# Altium PCB ElectrodeBreakout.PcbDoc
Units mil, origin at the board's own origin, x right, y up, seen from the top; angles counter-clockwise.
Board outline 3000 x 1500 mil, 2 copper layers (Top Layer, Bottom Layer); 23 components, 17 nets, 93 pads, 18 vias.
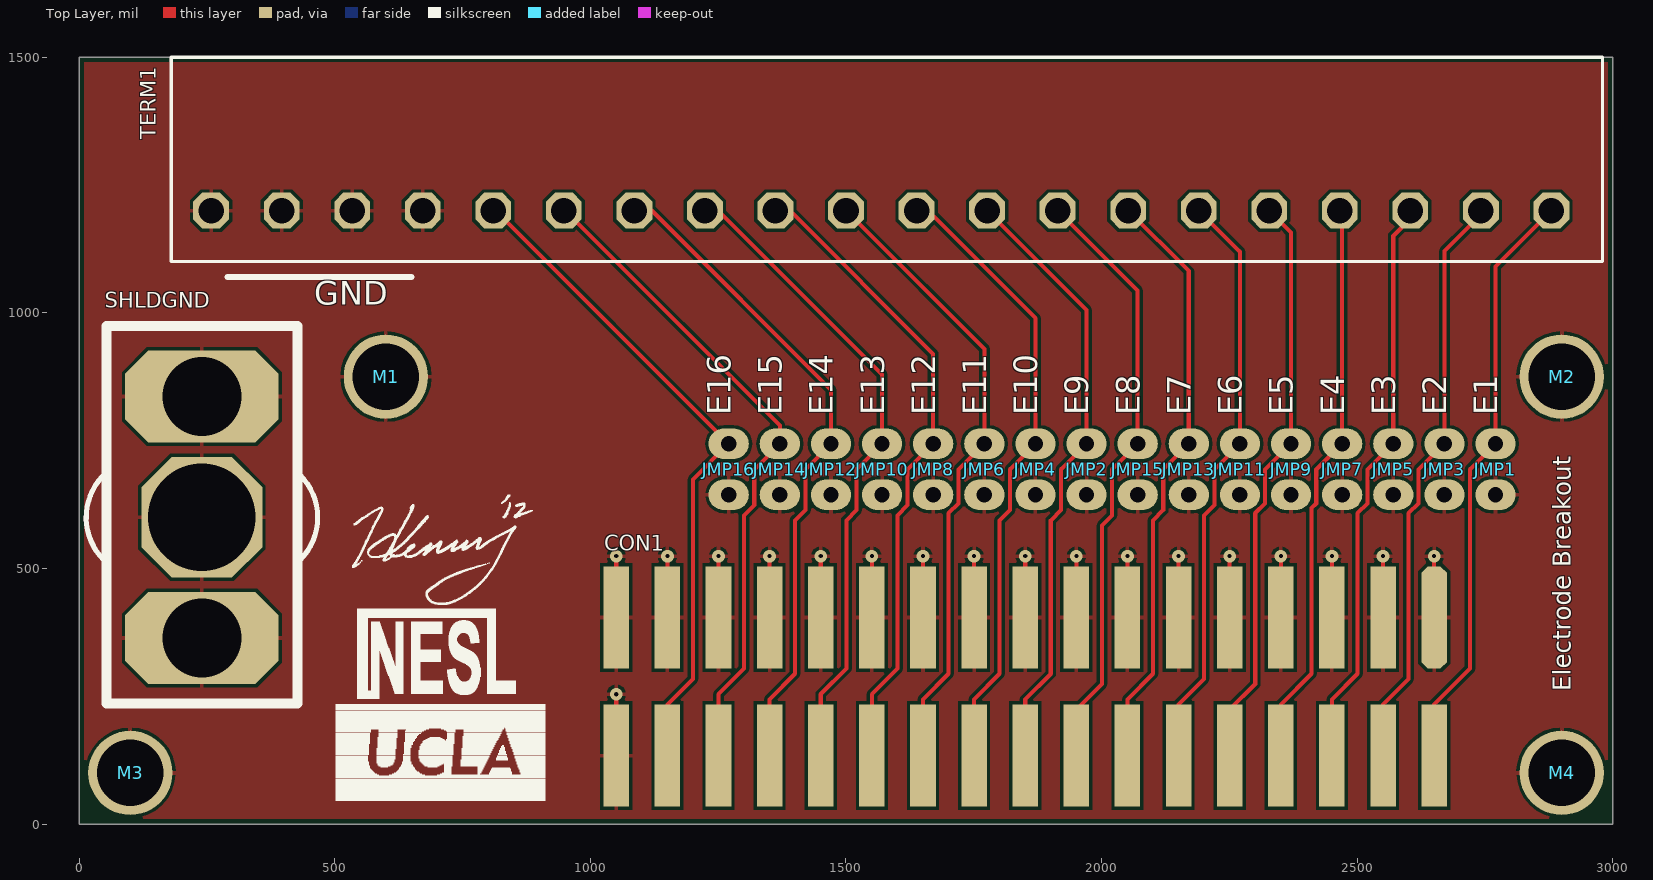
[diagram p0: Top Layer view]
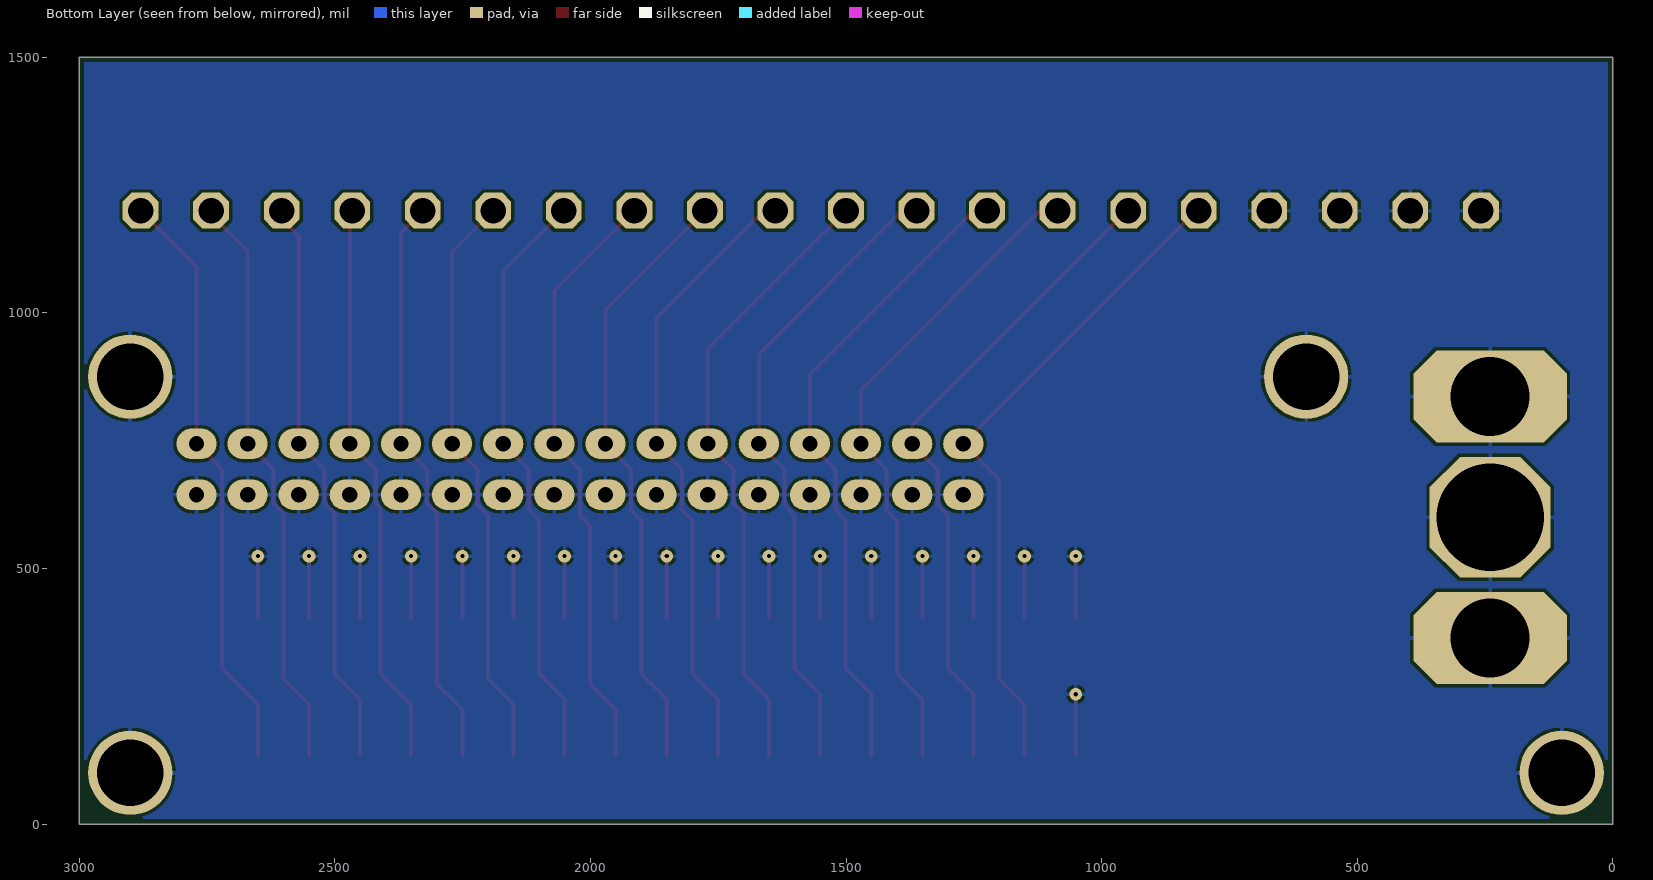
[diagram p1: Bottom Layer view, seen from below]

## Layer stack, top to bottom
Top Layer: signal copper 1.4
Dielectric: dielectric 12.6, FR-4, Dk 4.8
Bottom Layer: signal copper 1.4

## Board outline
0,0 3000,0 3000,1500 0,1500

## Design rules (kind name [scope] priority, off if disabled: settings)
Clearance "Clearance~Sunstone Circuits" [All] p1: gap=6 // Sunstone Circuits Minimum Clearance Rule (MLB~4&6 Layer Designs)
HoleSize "HoleSize~Sunstone Circuits" [All] p1: absolutevalues=TRUE maxlimit=251 minlimit=8 maxpercent=80.000 minpercent=20.000 // Sunstone Circuits Hole Size Rule (MLB~4&6 Layer Designs)
HoleSize Testpoint [All] p2: absolutevalues=TRUE maxlimit=100 minlimit=1 maxpercent=80.000 minpercent=20.000
HoleSize TestPointUsage [All] p3: absolutevalues=TRUE maxlimit=100 minlimit=1 maxpercent=80.000 minpercent=20.000
MinimumAnnularRing "MinimumAnnularRing~Sunstone Circuits" [All] p1: minimumring=7 // Sunstone Circuits Minimum Annular Ring (MLB~4&6 Layer Designs)
PlaneClearance "PlaneClearance~Sunstone Circuits" [All] p1: clearance=12 // Sunstone Circuits Power Plane Clearance Rule (MLB~4&6 Layer Designs)
PlaneConnect "PlaneConnect~Sunstone Circuits" [All] p1: planeconnectstyle=Relief reliefexpansion=10 reliefentries=4 reliefconductorwidth=8 reliefairgap=10 // Sunstone Circuits Power Plane Connect Rule (MLB~4&6 Layer Designs)
PolygonConnect "PolygonConnect~Sunstone Circuits" [All] p1: connectstyle=Relief reliefconductorwidth=8 reliefentries=4 polygonreliefangle="90 Angle" // Sunstone Circuits Polygon Connect Style (MLB~4&6 Layer Designs)
RoomDefinition ElectrodeBreakout [InComponentClass('ElectrodeBreakout')] p1: confinementstyle=ConfineIn formatcopy=TRUE lockcomponents=FALSE outline -2.27,-4.56 2997.73,-4.56 2997.73,1515.44 -2.27,1515.44
RoutingVias "RoutingVias~Sunstone Circuits" [All] p1: holewidth=16 width=30 viastyle="Through Hole" minholewidth=8 minwidth=24 maxholewidth=20 maxwidth=40 // Sunstone Circuits Routing Vias Rule (MLB~4&6 Layer Designs)
ShortCircuit "ShortCircuit~Sunstone Circuits" [All] p1: allowed=FALSE // Sunstone Circuits Short Circuit Rule~Do Not Allow (MLB~4&6 Layer Designs)
SilkscreenOverComponentPads [All] p1: minsilkscreentomaskgap=10
SolderMaskExpansion "SolderMaskExpansion~Sunstone Circuits" [All] p1: expansion=3 // Sunstone Circuits Solder Mask Expansion Rule (MLB~4&6 Layer Designs)
ViasUnderSMD "ViasUnderSMD~Sunstone Circuits" [All] p1: allowed=FALSE // Sunstone Circuits Vias Under SMD~Do Not Allow (MLB~4&6 Layer Designs)
Width "Width~Sunstone Circuits" [All] p1: maxlimit=100 minlimit=6 preferedwidth=10 // Sunstone Circuits Minimum Width Rule (MLB~4&6 Layer Designs)
23 further rules are at their usual default settings.

## Components (designator, comment, footprint, x,y, rotation, side; value= is the part's Value field where it differs from the comment)
CON1 "34 Rectangular Header Pin" "34PIN-RECTANGULAR HEADER-SURFACEMOUNT-100MILSPACING" 2650.58,403.9 r180 top
JMP1 "JMPR-2PIN-THRU" M02 2770.58,643.9 r90 top
JMP2 "JMPR-2PIN-THRU" M02 1970.58,643.9 r90 top
JMP3 "JMPR-2PIN-THRU" M02 2670.58,643.9 r90 top
JMP4 "JMPR-2PIN-THRU" M02 1870.58,643.9 r90 top
JMP5 "JMPR-2PIN-THRU" M02 2570.58,643.9 r90 top
JMP6 "JMPR-2PIN-THRU" M02 1770.58,643.9 r90 top
JMP7 "JMPR-2PIN-THRU" M02 2470.58,643.9 r90 top
JMP8 "JMPR-2PIN-THRU" M02 1670.58,643.9 r90 top
JMP9 "JMPR-2PIN-THRU" M02 2370.58,643.9 r90 top
JMP10 "JMPR-2PIN-THRU" M02 1570.58,643.9 r90 top
JMP11 "JMPR-2PIN-THRU" M02 2270.58,643.9 r90 top
JMP12 "JMPR-2PIN-THRU" M02 1470.58,643.9 r90 top
JMP13 "JMPR-2PIN-THRU" M02 2170.58,643.9 r90 top
JMP14 "JMPR-2PIN-THRU" M02 1370.58,643.9 r90 top
JMP15 "JMPR-2PIN-THRU" M02 2070.58,643.9 r90 top
JMP16 "JMPR-2PIN-THRU" M02 1270.58,643.9 r90 top
M1 "HOLE" "MOUNTING_HOLE-125mil - Thin"#1 560,880 r0 top
M2 "HOLE" "MOUNTING_HOLE-125mil - Thin"#2 2900,880 r0 top
M3 "HOLE" "MOUNTING_HOLE-125mil - Thin"#3 100,100 r0 top
M4 "HOLE" "MOUNTING_HOLE-125mil - Thin"#3 2900,100 r0 top
SHLDGND "SCREW TERM (10-32)" LOW-PROFILE-SCREWTERMINAL 240,600 r90 top (schematic designator CON2)
TERM1 "TERM BLOCK 20POS" EUROSTYLECONNECTOR-20PIN-3.5MM 2880,1200 r180 top

## Footprints (in the part's own frame and the unit in brackets; to place one, negate y for a bottom-side part, rotate by r counter-clockwise, add the part's x,y. Pads: shape width x height; smd on the part's side, far side on the other; paste and mask are expansions set on the pad)
"34PIN-RECTANGULAR HEADER-SURFACEMOUNT-100MILSPACING" [mm]
  oct 1.27x5.08 smd: 1(0,0)
  rect 1.27x5.08 smd: 2(0,6.86) 3(2.54,0) 4(2.54,6.86) 5(5.08,0) 6(5.08,6.86) 7(7.62,0) 8(7.62,6.86) 9(10.16,0) 10(10.16,6.86) 11(12.7,0) 12(12.7,6.86) 13(15.24,0) 14(15.24,6.86) 15(17.78,0) 16(17.78,6.86) 17(20.32,0) 18(20.32,6.86) 19(22.86,0) 20(22.86,6.86) 21(25.4,0) 22(25.4,6.86) 23(27.94,0) 24(27.94,6.86) 25(30.48,0) 26(30.48,6.86) 27(33.02,0) 28(33.02,6.86) 29(35.56,0) 30(35.56,6.86) 31(38.1,0) 32(38.1,6.86) 33(40.64,0) 34(40.64,6.86)
EUROSTYLECONNECTOR-20PIN-3.5MM [mil]
  oct 70x70 hole 50: 1(0,0) 2(138,0) 3(276,0) 4(414,0) 5(552,0) 6(690,0) 7(828,0) 8(966,0) 9(1104,0) 10(1242,0) 11(1380,0) 12(1518,0) 13(1656,0) 14(1794,0) 15(1932,0) 16(2070,0) 17(2208,0) 18(2346,0) 19(2484,0) 20(2622,0)
  silkscreen extent -100,-300 2700,100
LOW-PROFILE-SCREWTERMINAL [mil] "TERMINAL SCREW 10/32 .062\"PC MNT"
  oct 180x300 hole 155: 1(-236.22,0) 1(236.22,0)
  oct 236.22x236.22 hole 210: 1(0,0)
  silkscreen extent -364,-226 374,226
M02 [mil]
  oval 60x78.74 hole 30: 1(0,0) 2(100,0)
"MOUNTING_HOLE-125mil - Thin"#1 [mil]
  round 165 hole 130: 0(40,-5)
"MOUNTING_HOLE-125mil - Thin"#2 [mil]
  round 165 hole 130: 0(0,-5)
"MOUNTING_HOLE-125mil - Thin"#3 [mil]
  round 165 hole 130: 0(0,0)

## Part data
CON1: library part 34pinHeader
M1 M2 M3 M4: library part MountingHole
SHLDGND: library part ScrewTerminal-PCB-ThruHole
TERM1: library part EuroStyleTerminalBlock_20Pin

## Via types
v1: diameter 25, hole 8, Top Layer to Bottom Layer, 18 vias

## Nets (pads, with @x,y where several pads share a name; then routed paths per layer and width w, separated by ;. In a path a pad name is that pad's centre, name@x,y a point inside that pad or via, vN(x,y) a via of type N, cw(c..) or ccw(c..) an arc to the next point about the centre after c; other vN are vias at no path point)
ELECTRODE1: CON1.2 JMP1.2 TERM1.1 | length 1161.2
  Top Layer w8: CON1.2 2650.58,233.9 2720.58,303.9 2720.58,693.9 JMP1.2 2770.58,1090.58 TERM1.1
ELECTRODE2: CON1.4 JMP3.2 TERM1.2 | length 1145.5
  Top Layer w8: CON1.4 2550.58,233.9 2600.58,283.9 2600.58,607.96 2619.95,627.33 2619.95,693.27 JMP3.2 2670.58,1120.58 2742,1192 TERM1.2
ELECTRODE3: CON1.6 JMP5.2 TERM1.3 | length 1129.7
  Top Layer w8: CON1.6 2450.58,243.9 2500.58,293.9 2500.58,607.96 2519.95,627.33 2519.95,693.27 JMP5.2 2570.58,1150.58 2604,1184 TERM1.3
ELECTRODE4: CON1.8 JMP7.2 TERM1.4 | length 1117.8
  Top Layer w8: CON1.8 2350.58,233.9 2410.58,293.9 2410.58,617.96 2419.95,627.33 2419.95,693.27 JMP7.2 2470.58,1195.42 TERM1.4
ELECTRODE5: CON1.10 JMP9.2 TERM1.5 | length 1133.5
  Top Layer w8: CON1.10 2250.58,223.9 2300.58,273.9 2300.58,607.96 2319.95,627.33 2319.95,693.27 JMP9.2 2370.58,1157.42 TERM1.5
ELECTRODE6: CON1.12 JMP11.2 TERM1.6 | length 1149.3
  Top Layer w8: CON1.12 2150.58,233.9 2200.58,283.9 2200.58,603.9 2220.58,623.9 2220.58,693.9 JMP11.2 2270.58,1119.42 TERM1.6
ELECTRODE7: CON1.14 JMP13.2 TERM1.7 | length 1165
  Top Layer w8: CON1.14 2050.58,243.9 2100.58,293.9 2100.58,593.9 2120.58,613.9 2120.58,693.9 JMP13.2 2170.58,1081.42 TERM1.7
ELECTRODE8: CON1.16 JMP15.2 TERM1.8 | length 1180.7
  Top Layer w8: TERM1.8 2070.58,1043.42 JMP15.2 2020.58,693.9 2020.58,603.9 2000.58,583.9 2000.58,273.9 1950.58,223.9 CON1.16
ELECTRODE9: CON1.18 JMP2.2 TERM1.9 | length 1196.5
  Top Layer w8: TERM1.9 1970.58,1005.42 JMP2.2 1920.58,693.9 1920.58,613.9 1900.58,593.9 1900.58,293.9 1850.58,243.9 CON1.18
ELECTRODE10: CON1.20 JMP4.2 TERM1.10 | length 1225.1
  Top Layer w8: TERM1.10 1660,1200 1870.58,989.42 JMP4.2 1820.58,693.9 1820.58,613.9 1800.58,593.9 1800.58,293.9 1750.58,243.9 CON1.20
ELECTRODE11: CON1.22 JMP6.2 TERM1.11 | length 1228
  Top Layer w8: TERM1.11 1770.58,929.42 JMP6.2 1719.95,693.27 1719.95,627.33 1700.58,607.96 1700.58,293.9 1650.58,243.9 CON1.22
ELECTRODE12: CON1.24 JMP8.2 TERM1.12 | length 1260.1
  Top Layer w8: TERM1.12 1390,1200 1670.58,919.42 JMP8.2 1620.58,693.9 1620.58,623.9 1600.58,603.9 1600.58,303.9 1550.58,253.9 CON1.24
ELECTRODE13: CON1.26 JMP10.2 TERM1.13 | length 1274.7
  Top Layer w8: TERM1.13 1250,1200 1570.58,879.42 JMP10.2 1520.58,693.9 1520.58,613.9 1500.58,593.9 1500.58,303.9 1450.58,253.9 CON1.26
ELECTRODE14: CON1.28 JMP12.2 TERM1.14 | length 1295.1
  Top Layer w8: TERM1.14 1120,1200 1470.58,849.42 JMP12.2 1420.58,693.9 1420.58,613.9 1400.58,593.9 1400.58,293.9 1350.58,243.9 CON1.28
ELECTRODE15: CON1.30 JMP14.2 TERM1.15 | length 1292.1
  Top Layer w8: TERM1.15 950,1200 1370.58,779.42 JMP14.2 1320.58,693.9 1320.58,623.9 1300.58,603.9 1300.58,303.9 1250.58,253.9 CON1.30
ELECTRODE16: CON1.32 JMP16.2 TERM1.16 | length 1309.3
  Top Layer w8: TERM1.16 814.48,1200 JMP16.2 1200.58,673.9 1200.58,283.9 1150.58,233.9 CON1.32
GND: CON1.1 CON1.3 CON1.5 CON1.7 CON1.9 CON1.11 CON1.13 CON1.15 CON1.17 CON1.19 CON1.21 CON1.23 CON1.25 CON1.27 CON1.29 CON1.31 CON1.33 CON1.34 JMP1.1 JMP2.1 JMP3.1 JMP4.1 JMP5.1 JMP6.1 JMP7.1 JMP8.1 JMP9.1 JMP10.1 JMP11.1 JMP12.1 JMP13.1 JMP14.1 JMP15.1 JMP16.1 M1.0 M2.0 M3.0 M4.0 SHLDGND.1 TERM1.17 TERM1.18 TERM1.19 TERM1.20 | length 2160.1
  Top Layer w8: CON1.34 v1(1050.58,253.9) ; CON1.33 v1(1050.58,523.9) ; CON1.31 v1(1150.58,523.9) ; CON1.29 v1(1250.58,523.9) ; CON1.27 v1(1350.58,523.9) ; CON1.25 v1(1450.58,523.9) ; CON1.23 v1(1550.58,523.9) ; CON1.21 v1(1650.58,523.9) ; CON1.19 v1(1750.58,523.9) ; CON1.17 v1(1850.58,523.9) ; CON1.15 v1(1950.58,523.9) ; CON1.13 v1(2050.58,523.9) ; CON1.11 v1(2150.58,523.9) ; CON1.9 v1(2250.58,523.9) ; CON1.7 v1(2350.58,523.9) ; CON1.5 v1(2450.58,523.9) ; CON1.3 v1(2550.58,523.9) ; CON1.1 v1(2650.58,523.9)

## Polygon pours and split planes (outlines as drawn)
GND on Bottom Layer "GND@BOT" (solid, pour order 1000): 10,1490 2990,1490 2990,10 2890,10 10,10 10,1490
GND on Top Layer "GND@TOP" (solid, pour order 1001): 10,1490 2990,1490 2990,1420 2990,10 2940,10 10,10 10,1490

## Silkscreen, mask and mechanical layers (free items; w line width, h text height)
Top Overlay:
  drawing of 3198 lines, arcs and shapes, not listed
  text "GND" at 460,1000 h78.74
  text "E16" at 1290,800 h78.74 r90
  text "E15" at 1390,800 h78.74 r90
  text "E14" at 1490,800 h78.74 r90
  text "E13" at 1590,800 h78.74 r90
  text "E12" at 1690,800 h78.74 r90
  text "E11" at 1790,800 h78.74 r90
  text "E10" at 1890,800 h78.74 r90
  text "E9" at 1990,800 h78.74 r90
  text "E8" at 2090,800 h78.74 r90
  text "E7" at 2190,800 h78.74 r90
  text "E6" at 2290,800 h78.74 r90
  text "E5" at 2390,800 h78.74 r90
  text "E4" at 2490,800 h78.74 r90
  text "E3" at 2590,800 h78.74 r90
  text "E2" at 2690,800 h78.74 r90
  text "E1" at 2790,800 h78.74 r90
  text "Electrode Breakout" at 2930,260 h60 r90
Mechanical 2:
  lines w5: -3792.27,-404.56 -3542.27,-404.56 ; 1577.73,-4524.56 1577.73,-4274.56 ; 1577.73,3715.44 1577.73,3465.44 ; 6947.73,-404.56 6697.73,-404.56 ; -3542.27,-404.56 -3692.27,-491.16 -3692.27,-317.95 -3542.27,-404.56 ; 1577.73,-4274.56 1664.33,-4424.56 1491.13,-4424.56 1577.73,-4274.56 ; 1577.73,3465.44 1664.33,3615.44 1491.13,3615.44 1577.73,3465.44 ; 6697.73,-404.56 6847.73,-491.16 6847.73,-317.95 6697.73,-404.56 ; -3542.27,-4274.56 6697.73,-4274.56 6697.73,3465.44 -3542.27,3465.44 -3542.27,-4274.56
  text "2" at -1208.66,3505.44 h120
  text "1" at 4300.66,3505.44 h120
  text "B" at -3678.89,1660.44 h120
  text "B" at 6761.11,1660.44 h120
  text "A" at -3693.31,-2589.56 h120
  text "A" at 6746.69,-2589.56 h120
  text "2" at -1208.66,-4434.56 h120
  text "1" at 4300.66,-4434.56 h120
Mechanical 3:
  lines w5: -1052.27,-4024.56 1697.73,-4024.56 6697.73,-4024.56 ; -1052.27,-3649.56 1697.73,-3649.56 ; -1052.27,-3274.56 1697.73,-3274.56 ; -1052.27,-2899.56 1697.73,-2899.56 ; -1052.27,-2524.56 1697.73,-2524.56 ; -1052.27,-2149.56 1697.73,-2149.56 ; 697.73,-4274.56 697.73,-1774.56 ; 1697.73,-4274.56 1697.73,-1774.56 ; 1697.73,-3524.56 6697.73,-3524.56 ; 1697.73,-2394.55 6697.73,-2394.55 ; 2197.73,-4024.56 2197.73,-3524.56 ; 2817.74,-4274.56 2817.74,-4024.56 ; 3197.73,-4024.56 3197.73,-3524.56 ; 4697.73,-4274.56 4697.73,-4024.56 ; 6197.73,-4024.56 6197.73,-3524.56 ; -1052.27,-4274.56 6697.73,-4274.56 6697.73,-1774.56 -1052.27,-1774.56 -1052.27,-4274.56
  text "DRAWN" at -1022.27,-1904.56 h100
  text "CHECKED" at -1022.27,-2279.56 h100
  text "TITLE" at 1727.73,-2524.55 h100
  text "QA" at -1022.27,-2654.56 h100
  text "MFG" at -1022.27,-3029.56 h100
  text "APPROVED" at -1022.27,-3404.56 h100
  text "SIZE" at 1806.73,-3654.56 h100
  text "DWG NO" at 3227.73,-3654.56 h100
  text "REV" at 6325.16,-3654.56 h100
  text "SCALE" at 1727.73,-4154.56 h100
Mechanical 4:
  the board outline again, w5
Mechanical 5:
  circle w5: c2900,100 r50
  circle w5: c100,1400 r50
  circle w5: c2900,1400 r50
  circle w5: c100,100 r50